# EAGLE board MRCS-BBProMini_array (EAGLE 7.7.0)
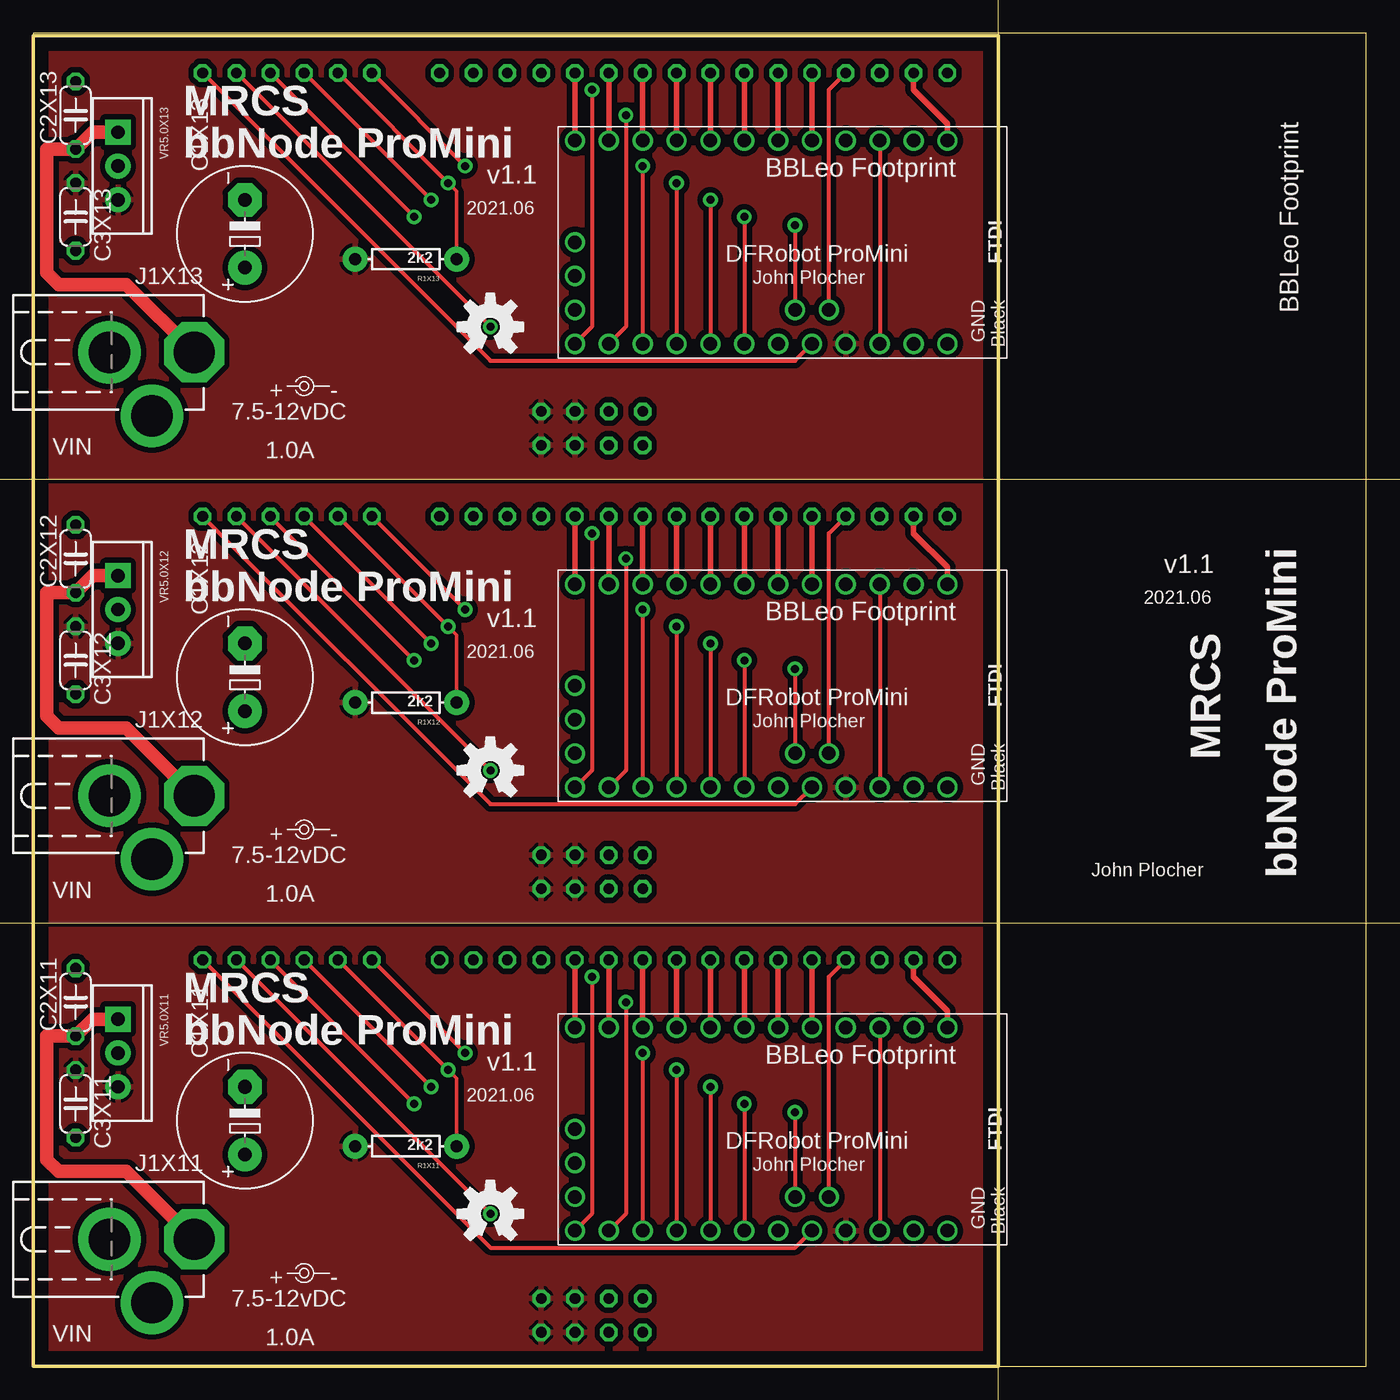
[diagram p0: board, top side]
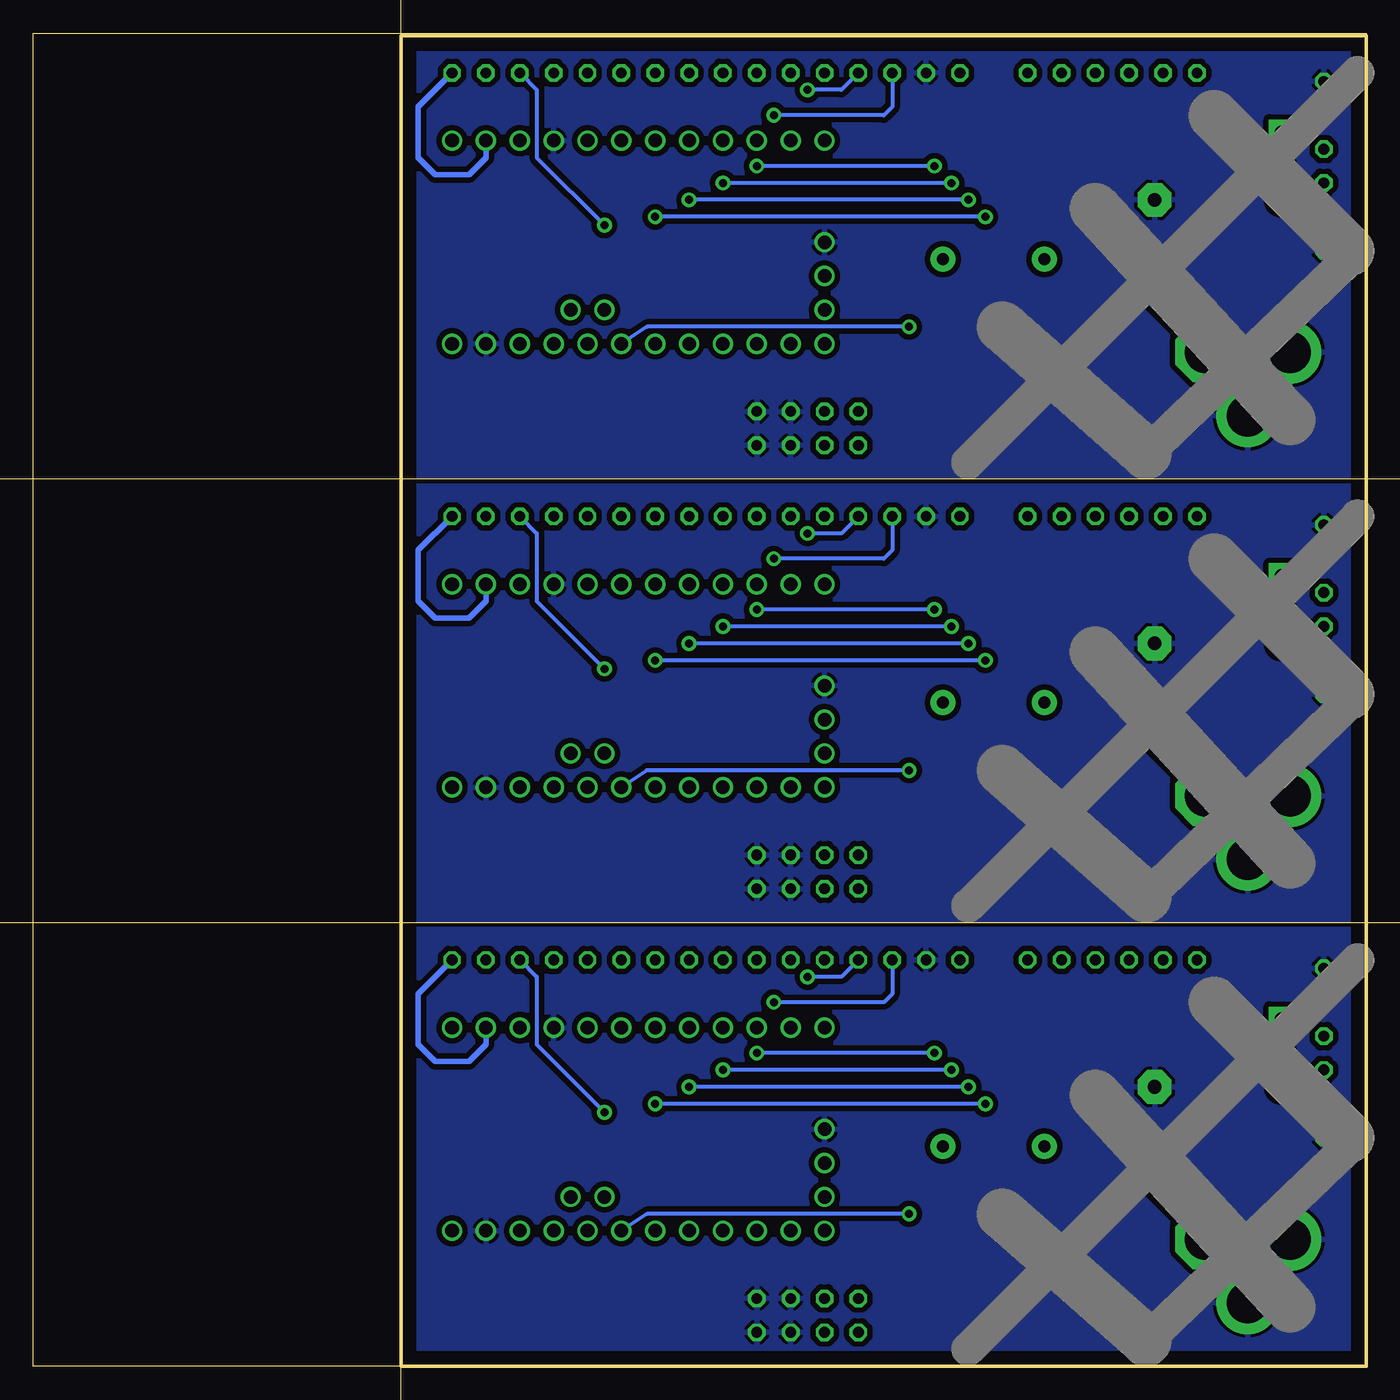
[diagram p1: board, bottom side, seen from below]

Size 100 x 100 mm. Coordinates in mm from the lower left corner, seen from the top.
Outline: 0,0 100,0 100,100 0,100 0,0
Outline: 0,0 72.39,0 72.39,99.82 0,99.82 0,0
Copper layers (1*16): Top 0.035mm / dielectric 1.5mm / Bottom 0.035mm
Design rules "default": minimum track width 10mil, minimum drill 0.6mm, track to track 8mil, track to pad 8mil, pad to pad 8mil, via to via 8mil, smd to smd 8mil, copper to edge 40mil, drill to drill 8mil, minimum pad ring 10mil, minimum via ring 8mil, stop-mask expansion 4mil, vias tented up to drill 0mil, thermal gap 10mil
Milling: 3 lines

## Footprints (pad centres in the part's own frame; a part is rotated, then mirrored left to right if it is on the bottom)
ARDUINO_PRO_MINI_DAVEK = drill 1.016: 5V 16.51,21.59; AD0 16.51,11.43; AD1 16.51,13.97; AD2 16.51,16.51; AD3 16.51,19.05; AD4 13.97,17.78; AD5 13.97,20.32; AD6 11.43,1.27; AD7 13.97,1.27; D2 1.27,19.05; D3 1.27,16.51; D4 1.27,13.97; D5 1.27,11.43; D6 1.27,8.89; D7 1.27,6.35; D8 1.27,3.81; D9 1.27,1.27; D10 16.51,1.27; D11 16.51,3.81; D12 16.51,6.35; D13 16.51,8.89; GND@1 16.51,26.67; GND@2 8.89,1.27; GND@4 1.27,21.59; RES 16.51,24.13; RES@1 1.27,24.13; RX 1.27,26.67; TX@1 1.27,29.21; VIN 16.51,29.21
ARDUINO-BBLEO = drill 0.8 octagon: +5V@1 40.64,5.08; +5V@2 40.64,2.54; +5V@3 38.1,5.08; +5V@4 38.1,2.54; A0 25.4,30.48; A1 22.86,30.48; A2 20.32,30.48; A3 17.78,30.48; A4 15.24,30.48; A5 12.7,30.48; AR 30.48,30.48; D4 58.42,30.48; D5 55.88,30.48; D6 53.34,30.48; D7 50.8,30.48; D8 48.26,30.48; D9 45.72,30.48; D10 43.18,30.48; D11 40.64,30.48; D12 38.1,30.48; D13 35.56,30.48; GND@0 33.02,30.48; GND@1 43.18,5.08; GND@2 45.72,5.08; GND@3 43.18,2.54; GND@4 45.72,2.54; RX 68.58,30.48; SCL 60.96,30.48; SDA 63.5,30.48; TX 66.04,30.48
E5-10.5 = drill 1.016 pad 2.54: + -2.54,0 | drill 1.016 pad 2.54 octagon: - 2.54,0
C050-024X044 = drill 0.813 octagon: 1 -2.54,0; 2 2.54,0
DCJ0202 = drill 3.1 pad 4.5 octagon: 1 0,3.175 | drill 3.1 pad 4.7: 2 4.763,0; 3 0,-3.175
AXIAL-0.3-RES = drill 0.9 pad 1.88: P$1 -3.81,0; P$2 3.81,0
TO-220-RA = drill 1 pad 1.88: GND 0,0; OUT 2.54,0 | drill 1 pad 1.88 square: IN -2.54,0

## Placement (x,y rotation side)
ARDUINO1X11  DAVEK  [ARDUINO_PRO_MINI_DAVEK]  39.37,26.67 270 top
ARDUINO1X12  DAVEK  [ARDUINO_PRO_MINI_DAVEK]  39.37,59.94 270 top
ARDUINO1X13  DAVEK  [ARDUINO_PRO_MINI_DAVEK]  39.37,93.22 270 top
BBLEOX11  Footprint  [ARDUINO-BBLEO]  0,0 0 top
BBLEOX12  Footprint  [ARDUINO-BBLEO]  0,33.27 0 top
BBLEOX13  Footprint  [ARDUINO-BBLEO]  0,66.55 0 top
C1X11  150uF  [E5-10.5]  15.88,18.41 90 top
C1X12  150uF  [E5-10.5]  15.88,51.69 90 top
C1X13  150uF  [E5-10.5]  15.88,84.96 90 top
C2X11  1.0uF  [C050-024X044]  3.17,27.3 90 top
C2X12  1.0uF  [C050-024X044]  3.17,60.58 90 top
C2X13  1.0uF  [C050-024X044]  3.17,93.85 90 top
C3X11  10uF  [C050-024X044]  3.17,19.68 270 top
C3X12  10uF  [C050-024X044]  3.17,52.96 270 top
C3X13  10uF  [C050-024X044]  3.17,86.23 270 top
J1X11  2.1mm  [DCJ0202]  8.89,9.53 270 top
J1X12  2.1mm  [DCJ0202]  8.89,42.8 270 top
J1X13  2.1mm  [DCJ0202]  8.89,76.07 270 top
LABEL1X11  7.5-12vDC  [PWR_LABEL]  20.32,6.99 90 top
LABEL1X12  7.5-12vDC  [PWR_LABEL]  20.32,40.26 90 top
LABEL1X13  7.5-12vDC  [PWR_LABEL]  20.32,73.53 90 top
OSHW1X11  OSHW  [OSHW-LOGO-M]  34.29,11.43 0 top
OSHW1X12  OSHW  [OSHW-LOGO-M]  34.29,44.7 0 top
OSHW1X13  OSHW  [OSHW-LOGO-M]  34.29,77.98 0 top
R1X11  2k2  [AXIAL-0.3-RES]  27.94,16.51 180 top
R1X12  2k2  [AXIAL-0.3-RES]  27.94,49.78 180 top
R1X13  2k2  [AXIAL-0.3-RES]  27.94,83.06 180 top
VR5.0X11  5v  [TO-220-RA]  6.35,23.5 270 top
VR5.0X12  5v  [TO-220-RA]  6.35,56.77 270 top
VR5.0X13  5v  [TO-220-RA]  6.35,90.04 270 top

## Library data of the parts
ARDUINO1X11-ARDUINO1X13 BBLEOX11-BBLEOX13 C1X11-C1X13 C2X11-C2X13 C3X11-C3X13 J1X11-J1X13 LABEL1X11-LABEL1X13 OSHW1X11-OSHW1X13 R1X11-R1X13 VR5.0X11-VR5.0X13 = SPCoast

## Nets
!RESETX11: ARDUINO1X11.RES ARDUINO1X11.RES@1
!RESETX12: ARDUINO1X12.RES ARDUINO1X12.RES@1
!RESETX13: ARDUINO1X13.RES ARDUINO1X13.RES@1
+9VX11: C1X11.+ C2X11.1 J1X11.1 VR5.0X11.IN
+9VX12: C1X12.+ C2X12.1 J1X12.1 VR5.0X12.IN
+9VX13: C1X13.+ C2X13.1 J1X13.1 VR5.0X13.IN
GNDX11: ARDUINO1X11.GND@1 ARDUINO1X11.GND@2 ARDUINO1X11.GND@4 BBLEOX11.GND@0 BBLEOX11.GND@1 BBLEOX11.GND@2 BBLEOX11.GND@3 BBLEOX11.GND@4 C1X11.- C2X11.2 C3X11.2 J1X11.2 J1X11.3 VR5.0X11.GND
GNDX12: ARDUINO1X12.GND@1 ARDUINO1X12.GND@2 ARDUINO1X12.GND@4 BBLEOX12.GND@0 BBLEOX12.GND@1 BBLEOX12.GND@2 BBLEOX12.GND@3 BBLEOX12.GND@4 C1X12.- C2X12.2 C3X12.2 J1X12.2 J1X12.3 VR5.0X12.GND
GNDX13: ARDUINO1X13.GND@1 ARDUINO1X13.GND@2 ARDUINO1X13.GND@4 BBLEOX13.GND@0 BBLEOX13.GND@1 BBLEOX13.GND@2 BBLEOX13.GND@3 BBLEOX13.GND@4 C1X13.- C2X13.2 C3X13.2 J1X13.2 J1X13.3 VR5.0X13.GND
GPA0X11: ARDUINO1X11.D2 BBLEOX11.D4
GPA0X12: ARDUINO1X12.D2 BBLEOX12.D4
GPA0X13: ARDUINO1X13.D2 BBLEOX13.D4
GPA1X11: ARDUINO1X11.D3 BBLEOX11.D5
GPA1X12: ARDUINO1X12.D3 BBLEOX12.D5
GPA1X13: ARDUINO1X13.D3 BBLEOX13.D5
GPA2X11: ARDUINO1X11.D4 BBLEOX11.D6
GPA2X12: ARDUINO1X12.D4 BBLEOX12.D6
GPA2X13: ARDUINO1X13.D4 BBLEOX13.D6
GPA3X11: ARDUINO1X11.D5 BBLEOX11.D7
GPA3X12: ARDUINO1X12.D5 BBLEOX12.D7
GPA3X13: ARDUINO1X13.D5 BBLEOX13.D7
GPA4X11: ARDUINO1X11.D6 BBLEOX11.D8
GPA4X12: ARDUINO1X12.D6 BBLEOX12.D8
GPA4X13: ARDUINO1X13.D6 BBLEOX13.D8
GPA5X11: ARDUINO1X11.D7 BBLEOX11.D9
GPA5X12: ARDUINO1X12.D7 BBLEOX12.D9
GPA5X13: ARDUINO1X13.D7 BBLEOX13.D9
GPA6X11: ARDUINO1X11.D8 BBLEOX11.D10
GPA6X12: ARDUINO1X12.D8 BBLEOX12.D10
GPA6X13: ARDUINO1X13.D8 BBLEOX13.D10
GPA7X11: ARDUINO1X11.D9 BBLEOX11.D11
GPA7X12: ARDUINO1X12.D9 BBLEOX12.D11
GPA7X13: ARDUINO1X13.D9 BBLEOX13.D11
GPB0X11: ARDUINO1X11.D10 BBLEOX11.D12
GPB0X12: ARDUINO1X12.D10 BBLEOX12.D12
GPB0X13: ARDUINO1X13.D10 BBLEOX13.D12
GPB1X11: ARDUINO1X11.D11 BBLEOX11.D13
GPB1X12: ARDUINO1X12.D11 BBLEOX12.D13
GPB1X13: ARDUINO1X13.D11 BBLEOX13.D13
GPB2X11: ARDUINO1X11.D12 BBLEOX11.A0
GPB2X12: ARDUINO1X12.D12 BBLEOX12.A0
GPB2X13: ARDUINO1X13.D12 BBLEOX13.A0
GPB3X11: ARDUINO1X11.D13 BBLEOX11.A1 R1X11.P$1
GPB3X12: ARDUINO1X12.D13 BBLEOX12.A1 R1X12.P$1
GPB3X13: ARDUINO1X13.D13 BBLEOX13.A1 R1X13.P$1
GPB4X11: ARDUINO1X11.AD0 BBLEOX11.A2
GPB4X12: ARDUINO1X12.AD0 BBLEOX12.A2
GPB4X13: ARDUINO1X13.AD0 BBLEOX13.A2
GPB5X11: ARDUINO1X11.AD1 BBLEOX11.A3
GPB5X12: ARDUINO1X12.AD1 BBLEOX12.A3
GPB5X13: ARDUINO1X13.AD1 BBLEOX13.A3
GPB6X11: ARDUINO1X11.AD2 BBLEOX11.A4
GPB6X12: ARDUINO1X12.AD2 BBLEOX12.A4
GPB6X13: ARDUINO1X13.AD2 BBLEOX13.A4
GPB7X11: ARDUINO1X11.AD3 BBLEOX11.A5
GPB7X12: ARDUINO1X12.AD3 BBLEOX12.A5
GPB7X13: ARDUINO1X13.AD3 BBLEOX13.A5
RXX11: ARDUINO1X11.RX BBLEOX11.RX
RXX12: ARDUINO1X12.RX BBLEOX12.RX
RXX13: ARDUINO1X13.RX BBLEOX13.RX
SCLX11: ARDUINO1X11.AD5 BBLEOX11.SCL
SCLX12: ARDUINO1X12.AD5 BBLEOX12.SCL
SCLX13: ARDUINO1X13.AD5 BBLEOX13.SCL
SDAX11: ARDUINO1X11.AD4 BBLEOX11.SDA
SDAX12: ARDUINO1X12.AD4 BBLEOX12.SDA
SDAX13: ARDUINO1X13.AD4 BBLEOX13.SDA
TXX11: ARDUINO1X11.TX@1 BBLEOX11.TX
TXX12: ARDUINO1X12.TX@1 BBLEOX12.TX
TXX13: ARDUINO1X13.TX@1 BBLEOX13.TX
VCCIOX11: ARDUINO1X11.5V BBLEOX11.+5V@1 BBLEOX11.+5V@2 BBLEOX11.+5V@3 BBLEOX11.+5V@4 C3X11.1 R1X11.P$2 VR5.0X11.OUT
VCCIOX12: ARDUINO1X12.5V BBLEOX12.+5V@1 BBLEOX12.+5V@2 BBLEOX12.+5V@3 BBLEOX12.+5V@4 C3X12.1 R1X12.P$2 VR5.0X12.OUT
VCCIOX13: ARDUINO1X13.5V BBLEOX13.+5V@1 BBLEOX13.+5V@2 BBLEOX13.+5V@3 BBLEOX13.+5V@4 C3X13.1 R1X13.P$2 VR5.0X13.OUT

## Tracks (layer width: path | path; a pad name or v marks a point on that pad's centre or on a via)
!RESETX11
  Top 0.305: ARDUINO1X11.RES@1 ARDUINO1X11.RES
!RESETX12
  Top 0.305: ARDUINO1X12.RES@1 ARDUINO1X12.RES
!RESETX13
  Top 0.305: ARDUINO1X13.RES@1 ARDUINO1X13.RES
+9VX11
  Top 1.016: VR5.0X11.IN 4.45,26.04 C2X11.1 1.02,24.77 1.02,15.49 1.91,14.61 6.99,14.61 J1X11.1
  Bottom 1.016: J1X11.1 15.88,13.34 C1X11.+
+9VX12
  Top 1.016: VR5.0X12.IN 4.45,59.31 C2X12.1 1.02,58.04 1.02,48.77 1.91,47.88 6.99,47.88 J1X12.1
  Bottom 1.016: J1X12.1 15.88,46.61 C1X12.+
+9VX13
  Top 1.016: VR5.0X13.IN 4.45,92.58 C2X13.1 1.02,91.31 1.02,82.04 1.91,81.15 6.99,81.15 J1X13.1
  Bottom 1.016: J1X13.1 15.88,79.88 C1X13.+
GNDX11
  pour Bottom (isolate 0.406, rank 2): 72.14,0.2 72.14,32.77 0.2,32.77 0.2,0.2
GNDX12
  pour Bottom (isolate 0.406, rank 2): 72.14,33.48 72.14,66.04 0.2,66.04 0.2,33.48
GNDX13
  pour Bottom (isolate 0.406, rank 2): 72.14,66.75 72.14,99.31 0.2,99.31 0.2,66.75
GPA0X11
  Top 0.406: ARDUINO1X11.D2 BBLEOX11.D4
GPA0X12
  Top 0.406: ARDUINO1X12.D2 BBLEOX12.D4
GPA0X13
  Top 0.406: ARDUINO1X13.D2 BBLEOX13.D4
GPA1X11
  Top 0.406: ARDUINO1X11.D3 BBLEOX11.D5
GPA1X12
  Top 0.406: ARDUINO1X12.D3 BBLEOX12.D5
GPA1X13
  Top 0.406: ARDUINO1X13.D3 BBLEOX13.D5
GPA2X11
  Top 0.406: ARDUINO1X11.D4 BBLEOX11.D6
GPA2X12
  Top 0.406: ARDUINO1X12.D4 BBLEOX12.D6
GPA2X13
  Top 0.406: ARDUINO1X13.D4 BBLEOX13.D6
GPA3X11
  Top 0.406: ARDUINO1X11.D5 BBLEOX11.D7
GPA3X12
  Top 0.406: ARDUINO1X12.D5 BBLEOX12.D7
GPA3X13
  Top 0.406: ARDUINO1X13.D5 BBLEOX13.D7
GPA4X11
  Top 0.406: ARDUINO1X11.D6 BBLEOX11.D8
GPA4X12
  Top 0.406: ARDUINO1X12.D6 BBLEOX12.D8
GPA4X13
  Top 0.406: ARDUINO1X13.D6 BBLEOX13.D8
GPA5X11
  Top 0.406: ARDUINO1X11.D7 BBLEOX11.D9
GPA5X12
  Top 0.406: ARDUINO1X12.D7 BBLEOX12.D9
GPA5X13
  Top 0.406: ARDUINO1X13.D7 BBLEOX13.D9
GPA6X11
  Top 0.406: ARDUINO1X11.D8 BBLEOX11.D10
GPA6X12
  Top 0.406: ARDUINO1X12.D8 BBLEOX12.D10
GPA6X13
  Top 0.406: ARDUINO1X13.D8 BBLEOX13.D10
GPA7X11
  Top 0.406: ARDUINO1X11.D9 BBLEOX11.D11
GPA7X12
  Top 0.406: ARDUINO1X12.D9 BBLEOX12.D11
GPA7X13
  Top 0.406: ARDUINO1X13.D9 BBLEOX13.D11
GPB0X11  (via drill 0.6 pad 1.11)
  Top 0.305: v41.91,29.21 41.91,11.43 ARDUINO1X11.D10
  Bottom 0.305: BBLEOX11.D12 39.37,29.21 v41.91,29.21
GPB0X12  (via drill 0.6 pad 1.11)
  Top 0.305: v41.91,62.48 41.91,44.7 ARDUINO1X12.D10
  Bottom 0.305: BBLEOX12.D12 39.37,62.48 v41.91,62.48
GPB0X13  (via drill 0.6 pad 1.11)
  Top 0.305: v41.91,95.76 41.91,77.98 ARDUINO1X13.D10
  Bottom 0.305: BBLEOX13.D12 39.37,95.76 v41.91,95.76
GPB1X11  (via drill 0.6 pad 1.11)
  Top 0.305: v44.45,27.3 44.45,11.43 ARDUINO1X11.D11
  Bottom 0.305: BBLEOX11.D13 35.56,27.94 36.2,27.3 v44.45,27.3
GPB1X12  (via drill 0.6 pad 1.11)
  Top 0.305: v44.45,60.58 44.45,44.7 ARDUINO1X12.D11
  Bottom 0.305: BBLEOX12.D13 35.56,61.21 36.2,60.58 v44.45,60.58
GPB1X13  (via drill 0.6 pad 1.11)
  Top 0.305: v44.45,93.85 44.45,77.98 ARDUINO1X13.D11
  Bottom 0.305: BBLEOX13.D13 35.56,94.49 36.2,93.85 v44.45,93.85
GPB2X11  (via drill 0.6 pad 1.11)
  Top 0.305: BBLEOX11.A0 v32.38,23.5 | v45.72,23.5 ARDUINO1X11.D12
  Bottom 0.305: v32.38,23.5 v45.72,23.5
GPB2X12  (via drill 0.6 pad 1.11)
  Top 0.305: BBLEOX12.A0 v32.38,56.77 | v45.72,56.77 ARDUINO1X12.D12
  Bottom 0.305: v32.38,56.77 v45.72,56.77
GPB2X13  (via drill 0.6 pad 1.11)
  Top 0.305: BBLEOX13.A0 v32.38,90.04 | v45.72,90.04 ARDUINO1X13.D12
  Bottom 0.305: v32.38,90.04 v45.72,90.04
GPB3X11  (via drill 0.6 pad 1.11)
  Top 0.254: v31.11,22.23 31.75,21.59 R1X11.P$1
  Top 0.305: BBLEOX11.A1 v31.11,22.23 | v48.26,22.23 ARDUINO1X11.D13
  Bottom 0.305: v31.11,22.23 v48.26,22.23
GPB3X12  (via drill 0.6 pad 1.11)
  Top 0.254: v31.11,55.5 31.75,54.86 R1X12.P$1
  Top 0.305: BBLEOX12.A1 v31.11,55.5 | v48.26,55.5 ARDUINO1X12.D13
  Bottom 0.305: v31.11,55.5 v48.26,55.5
GPB3X13  (via drill 0.6 pad 1.11)
  Top 0.254: v31.11,88.77 31.75,88.14 R1X13.P$1
  Top 0.305: BBLEOX13.A1 v31.11,88.77 | v48.26,88.77 ARDUINO1X13.D13
  Bottom 0.305: v31.11,88.77 v48.26,88.77
GPB4X11  (via drill 0.6 pad 1.11)
  Top 0.305: BBLEOX11.A2 v29.84,20.95 | v50.8,20.95 ARDUINO1X11.AD0
  Bottom 0.305: v29.84,20.95 v50.8,20.95
GPB4X12  (via drill 0.6 pad 1.11)
  Top 0.305: BBLEOX12.A2 v29.84,54.23 | v50.8,54.23 ARDUINO1X12.AD0
  Bottom 0.305: v29.84,54.23 v50.8,54.23
GPB4X13  (via drill 0.6 pad 1.11)
  Top 0.305: BBLEOX13.A2 v29.84,87.5 | v50.8,87.5 ARDUINO1X13.AD0
  Bottom 0.305: v29.84,87.5 v50.8,87.5
GPB5X11  (via drill 0.6 pad 1.11)
  Top 0.305: BBLEOX11.A3 v28.57,19.68 | v53.34,19.68 ARDUINO1X11.AD1
  Bottom 0.305: v28.57,19.68 v53.34,19.68
GPB5X12  (via drill 0.6 pad 1.11)
  Top 0.305: BBLEOX12.A3 v28.57,52.96 | v53.34,52.96 ARDUINO1X12.AD1
  Bottom 0.305: v28.57,52.96 v53.34,52.96
GPB5X13  (via drill 0.6 pad 1.11)
  Top 0.305: BBLEOX13.A3 v28.57,86.23 | v53.34,86.23 ARDUINO1X13.AD1
  Bottom 0.305: v28.57,86.23 v53.34,86.23
GPB6X11  (via drill 0.6 pad 1.11)
  Top 0.305: BBLEOX11.A4 v34.29,11.43
  Bottom 0.305: v34.29,11.43 53.98,11.43 ARDUINO1X11.AD2
GPB6X12  (via drill 0.6 pad 1.11)
  Top 0.305: BBLEOX12.A4 v34.29,44.7
  Bottom 0.305: v34.29,44.7 53.98,44.7 ARDUINO1X12.AD2
GPB6X13  (via drill 0.6 pad 1.11)
  Top 0.305: BBLEOX13.A4 v34.29,77.98
  Bottom 0.305: v34.29,77.98 53.98,77.98 ARDUINO1X13.AD2
GPB7X11
  Top 0.305: BBLEOX11.A5 34.29,8.89 57.15,8.89 ARDUINO1X11.AD3
GPB7X12
  Top 0.305: BBLEOX12.A5 34.29,42.16 57.15,42.16 ARDUINO1X12.AD3
GPB7X13
  Top 0.305: BBLEOX13.A5 34.29,75.44 57.15,75.44 ARDUINO1X13.AD3
RXX11
  Bottom 0.406: ARDUINO1X11.RX 66.04,24.13 67.31,22.86 69.85,22.86 71.12,24.13 71.12,27.94 BBLEOX11.RX
RXX12
  Bottom 0.406: ARDUINO1X12.RX 66.04,57.4 67.31,56.13 69.85,56.13 71.12,57.4 71.12,61.21 BBLEOX12.RX
RXX13
  Bottom 0.406: ARDUINO1X13.RX 66.04,90.68 67.31,89.41 69.85,89.41 71.12,90.68 71.12,94.49 BBLEOX13.RX
SCLX11
  Top 0.305: ARDUINO1X11.AD5 59.69,29.21 BBLEOX11.SCL
SCLX12
  Top 0.305: ARDUINO1X12.AD5 59.69,62.48 BBLEOX12.SCL
SCLX13
  Top 0.305: ARDUINO1X13.AD5 59.69,95.76 BBLEOX13.SCL
SDAX11  (via drill 0.6 pad 1.11)
  Top 0.305: v57.15,19.05 ARDUINO1X11.AD4
  Bottom 0.305: BBLEOX11.SDA 62.23,29.21 62.23,24.13 v57.15,19.05
SDAX12  (via drill 0.6 pad 1.11)
  Top 0.305: v57.15,52.32 ARDUINO1X12.AD4
  Bottom 0.305: BBLEOX12.SDA 62.23,62.48 62.23,57.4 v57.15,52.32
SDAX13  (via drill 0.6 pad 1.11)
  Top 0.305: v57.15,85.6 ARDUINO1X13.AD4
  Bottom 0.305: BBLEOX13.SDA 62.23,95.76 62.23,90.68 v57.15,85.6
TXX11
  Top 0.406: BBLEOX11.TX 66.04,29.21 68.58,26.67 ARDUINO1X11.TX@1
TXX12
  Top 0.406: BBLEOX12.TX 66.04,62.48 68.58,59.94 ARDUINO1X12.TX@1
TXX13
  Top 0.406: BBLEOX13.TX 66.04,95.76 68.58,93.22 ARDUINO1X13.TX@1
VCCIOX11
  pour Top (isolate 0.406, rank 2): 72.14,0.2 72.14,32.77 0.2,32.77 0.2,0.2
VCCIOX12
  pour Top (isolate 0.406, rank 2): 72.14,33.48 72.14,66.04 0.2,66.04 0.2,33.48
VCCIOX13
  pour Top (isolate 0.406, rank 2): 72.14,66.75 72.14,99.31 0.2,99.31 0.2,66.75

## Text on the board
tPlace: MRCS | BBLeo Footprint | bbNode ProMini | BBLeo Footprint | v1.1 | 2021.06 | DFRobot ProMini | John Plocher | VIN | 1.0A | MRCS | v1.1 | bbNode ProMini | BBLeo Footprint | 2021.06 | v1.1 | 2021.06 | DFRobot ProMini | John Plocher | MRCS | John Plocher | bbNode ProMini | VIN | 1.0A | MRCS | bbNode ProMini | BBLeo Footprint | v1.1 | 2021.06 | DFRobot ProMini | John Plocher | VIN | 1.0A
Milling: V-Score | V-Score | V-Score | V-Score | V-Score | V-Score | V-Score
bDocu: Model Railroading is fun! | Made in the PCR, / Coast Division, NMRA | Go Bears! | bbNode / Pro Mini | For use with DFRobot Pro Mini | MRCS | www. SP Coast .com | Model Railroading is fun! | Made in the PCR, / Coast Division, NMRA | Go Bears! | bbNode / Pro Mini | For use with DFRobot Pro Mini | MRCS | www. SP Coast .com | Model Railroading is fun! | Made in the PCR, / Coast Division, NMRA | Go Bears! | bbNode / Pro Mini | For use with DFRobot Pro Mini | MRCS | www. SP Coast .com
_tNames: C2 | VR5.0 | C1 | C3 | R1 | R1 | C2 | VR5.0 | C1 | C3 | R1 | R1 | C2 | VR5.0 | C1 | C3 | R1 | R1